# EAGLE board E-Piano-SM (EAGLE 9.4.0)
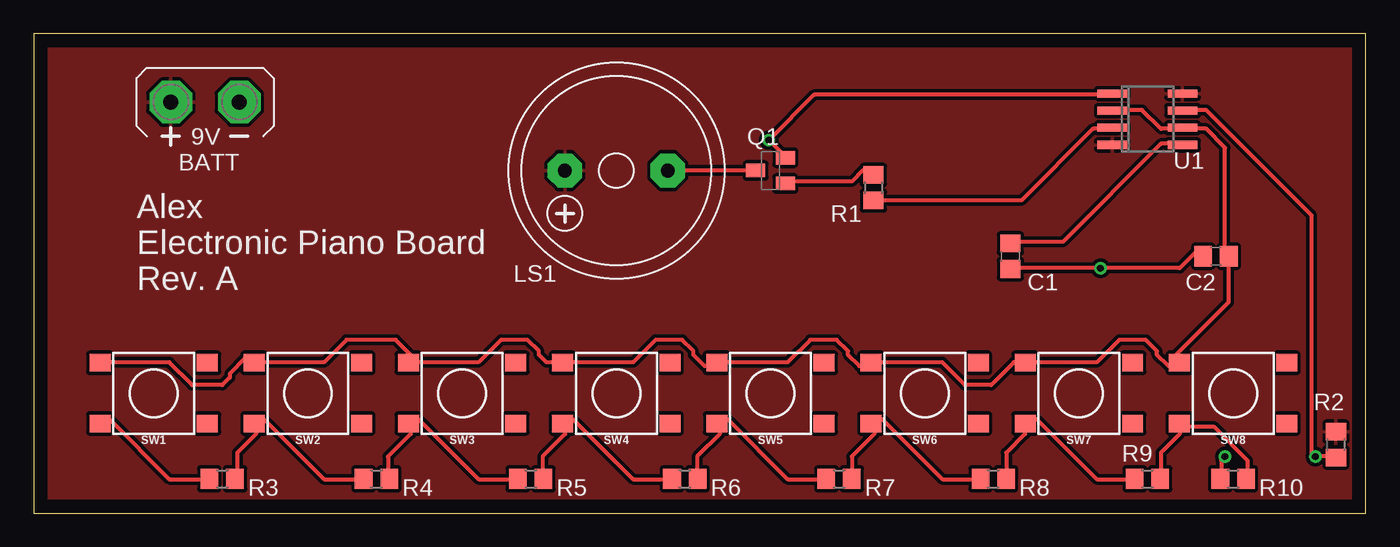
[diagram p0: board, top side]
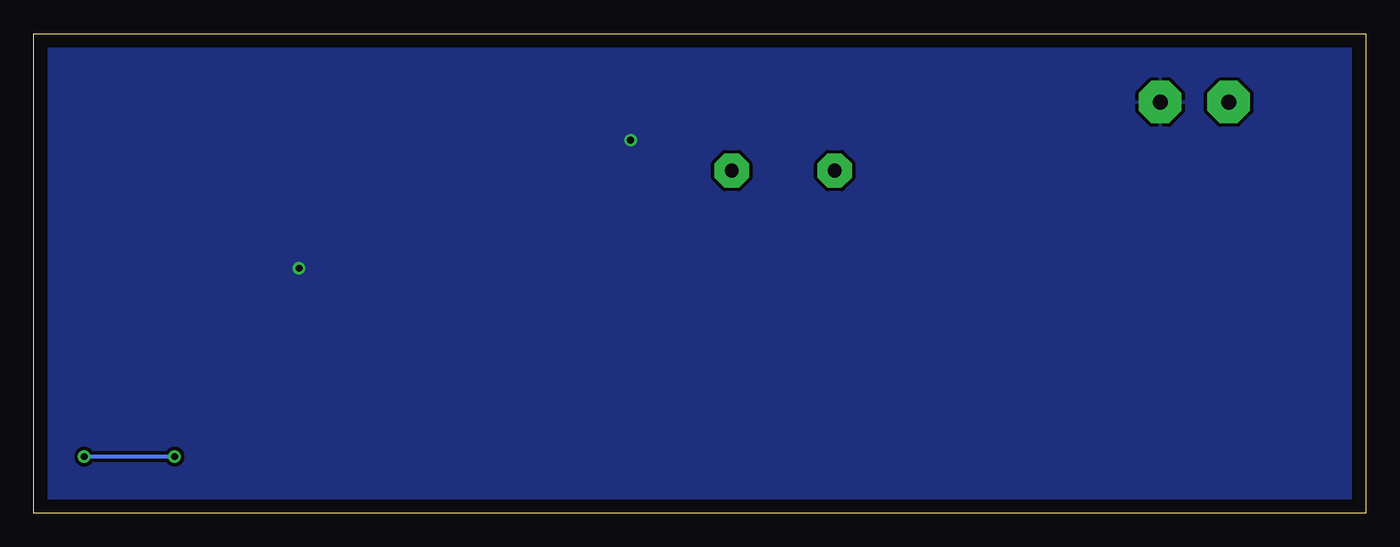
[diagram p1: board, bottom side, seen from below]

Size 98.73 x 35.55 mm. Coordinates in mm from the lower left corner, seen from the top.
Outline: 0,0 98.73,0 98.73,35.55 0,35.55 0,0
Copper layers (1*16): Top 0.035mm / dielectric 1.5mm / Bottom 0.035mm
Design rules "default": minimum track width 6mil, minimum drill 0.35mm, track to track 6mil, track to pad 6mil, pad to pad 6mil, via to via 6mil, smd to smd 6mil, copper to edge 40mil, drill to drill 6mil, minimum pad ring 10mil, minimum via ring 8mil, stop-mask expansion 4mil, vias tented up to drill 0mil, thermal gap 10mil
Net classes: 0 default: width 0.305 mm, drill 0.508 mm, clearance 0.254 mm

## Footprints (pad centres in the part's own frame; a part is rotated, then mirrored left to right if it is on the bottom)
AB9V = drill 1.118 pad 3.15 octagon: + 0,2.54; - 0,-2.54
C0805 = smd 1.3 x 1.5: 1 -0.95,0; 2 0.95,0
F/HMB = drill 1.016 pad 2.54 octagon: + 3.81,0; - -3.81,0
SOT23-BEC = smd 1 x 1.4: B -0.95,-1.1; C 0,1.1; E 0.95,-1.1
R0805 = smd 1.3 x 1.5: 1 -0.95,0; 2 0.95,0
TACTILE_SWITCH_SMD_6.2MM_TALL = smd 1.55 x 1.3: A1 -3.975,-2.25; A2 3.975,-2.25; B1 -3.975,2.25; B2 3.975,2.25
SO08 = smd 0.6 x 2.2: 1 -1.905,-2.6; 2 -0.635,-2.6; 3 0.635,-2.6; 4 1.905,-2.6; 5 1.905,2.6; 6 0.635,2.6; 7 -0.635,2.6; 8 -1.905,2.6

## Placement (x,y rotation side)
BATT  AB9V  [AB9V]  12.7,30.48 90 top
C1  0.1uF  [C0805]  72.39,19.05 270 top
C2  0.1uF  [C0805]  87.63,19.05 180 top
LS1  [F/HMB]  43.18,25.4 180 top
Q1  BCW66  [SOT23-BEC]  54.61,25.4 90 top
R1  3K  [R0805]  62.23,24.13 270 top
R2  1K  [R0805]  96.52,5.08 90 top
R3  1.5K  [R0805]  13.97,2.54 0 top
R4  1.3K  [R0805]  25.4,2.54 0 top
R5  620  [R0805]  36.83,2.54 0 top
R6  1.1K  [R0805]  48.26,2.54 0 top
R7  1K  [R0805]  59.69,2.54 0 top
R8  910  [R0805]  71.12,2.54 0 top
R9  390  [R0805]  82.55,2.54 0 top
R10  6.2K  [R0805]  88.9,2.54 0 top
SW1  MOMENTARY-SWITCH-SPST-SMD-6.2MM-TALL  [TACTILE_SWITCH_SMD_6.2MM_TALL]  8.89,8.89 180 top
SW2  MOMENTARY-SWITCH-SPST-SMD-6.2MM-TALL  [TACTILE_SWITCH_SMD_6.2MM_TALL]  20.32,8.89 180 top
SW3  MOMENTARY-SWITCH-SPST-SMD-6.2MM-TALL  [TACTILE_SWITCH_SMD_6.2MM_TALL]  31.75,8.89 180 top
SW4  MOMENTARY-SWITCH-SPST-SMD-6.2MM-TALL  [TACTILE_SWITCH_SMD_6.2MM_TALL]  43.18,8.89 180 top
SW5  MOMENTARY-SWITCH-SPST-SMD-6.2MM-TALL  [TACTILE_SWITCH_SMD_6.2MM_TALL]  54.61,8.89 180 top
SW6  MOMENTARY-SWITCH-SPST-SMD-6.2MM-TALL  [TACTILE_SWITCH_SMD_6.2MM_TALL]  66.04,8.89 180 top
SW7  MOMENTARY-SWITCH-SPST-SMD-6.2MM-TALL  [TACTILE_SWITCH_SMD_6.2MM_TALL]  77.47,8.89 180 top
SW8  MOMENTARY-SWITCH-SPST-SMD-6.2MM-TALL  [TACTILE_SWITCH_SMD_6.2MM_TALL]  88.9,8.89 180 top
U1  NE555D  [SO08]  82.55,29.21 270 top

## Library data of the parts
BATT = battery; MOUSER#: 534-81-8TB; MPN: 81-8; OC_NEWARK: unknown
C1 C2 = rcl; MOUSER#: 603-CC805JRX7R9BB104; MPN: CC805JRX7R9BB104; OC_NEWARK: unknown; SPICEPREFIX: C
LS1 = buzzer; MOUSER#: 665-AST-01508MR-R; OC_FARNELL: unknown; OC_NEWARK: unknown
Q1 = transistor; MF: FAIRCHILD SEMICONDUCTOR; MOUSER#: 726-BCW66KHE6327HTSA; MPN: PN2222ATF; OC_NEWARK: 58K2048
R1 R2 R7 = rcl; MOUSER#: 652-CR0805FX-1001ELF; OC_NEWARK: unknown; SPICEPREFIX: R
R3 = rcl; MOUSER#: 652-CR0805FX-1501ELF; OC_NEWARK: unknown; SPICEPREFIX: R
R4 = rcl; MOUSER#: 652-CR0805JW-132ELF; OC_NEWARK: unknown; SPICEPREFIX: R
R5 = rcl; MOUSER#: 652-CR0805JW-621ELF; OC_NEWARK: unknown; SPICEPREFIX: R
R6 = rcl; MOUSER#: 652-CR0805FX-1101ELF; OC_NEWARK: unknown; SPICEPREFIX: R
R8 = rcl; MOUSER#: 652-CR0805FX-9100ELF; OC_NEWARK: unknown; SPICEPREFIX: R
R9 = rcl; MOUSER#: 652-CR0805JW-391ELF; OC_NEWARK: unknown; SPICEPREFIX: R
R10 = rcl; MOUSER#: 652-CR0805FX-6201ELF; OC_NEWARK: unknown; SPICEPREFIX: R
SW1-SW8 = SparkFun-Switches; MOUSER#: 693-1301.9317; MPN: 1301.9317; OC_NEWARK: unknown; PROD_ID: SWCH-11966; SF_SKU: COM-12992
U1 = linear; MOUSER#: 595-TLC555CDR; OC_NEWARK: unknown

## Nets
0: BATT.- C1.2 C2.2 Q1.E U1.1
N$1: R9.2 R10.2 SW8.B2
N$2: R2.1 R10.1 U1.7
N$3: R3.1 SW1.B2
N$4: R8.2 R9.1 SW7.B2
N$5: R7.2 R8.1 SW6.B2
N$6: R6.2 R7.1 SW5.B2
N$7: R5.2 R6.1 SW4.B2
N$8: R4.2 R5.1 SW3.B2
N$9: R3.2 R4.1 SW2.B2
N$11: R1.2 U1.3
N$12: C1.1 U1.5
N$13: LS1.- Q1.C
N$14: Q1.B R1.1
TR: C2.1 SW1.A2 SW2.A2 SW3.A2 SW4.A2 SW5.A2 SW6.A2 SW7.A2 SW8.A2 U1.2 U1.6
VCC: BATT.+ LS1.+ R2.2 U1.4 U1.8

## Tracks (layer width: path | path; a pad name or v marks a point on that pad's centre or on a via)
0  (via drill 0.51)
  Top 0.305: C1.2 72.64,18.16 v79.07,18.16 84.94,18.16 86.06,19.28 86.61,19.28 C2.2 | Q1.E 55.82,26.33 v54.48,27.66 57.84,31.01 79.91,31.01 U1.1
  pour Bottom: -1.27,36.83 -1.27,-1.27 100.33,-1.27 100.33,36.83
N$1
  Top 0.305: 84.94,6.43 84.94,5.87 83.54,4.47 83.54,2.79 R9.2 | 84.94,6.43 87.45,6.43 89.97,3.91 89.97,2.79 R10.2 | 84.94,6.43 SW8.B2
N$2  (via drill 0.51)
  Top 0.305: v88.29,4.19 88.01,3.91 88.01,2.79 R10.1 | R2.1 96.39,4.19 v95,4.19 94.72,4.47 94.72,22.07 86.89,29.9 85.22,29.9 U1.7
  Bottom 0.305: v95,4.19 v88.29,4.19
N$3
  Top 0.305: R3.1 12.85,2.52 10.06,2.52 5.59,6.99 5.31,6.99 5.03,6.71 SW1.B2
N$4
  Top 0.305: R8.2 72.08,2.79 72.08,4.47 73.48,5.87 73.48,6.43 SW7.B2 73.76,6.71 74.04,6.99 74.32,6.99 78.79,2.52 81.58,2.52 R9.1
N$5
  Top 0.305: R7.2 60.63,2.79 60.63,4.19 62.31,5.87 62.31,6.43 SW6.B2 62.31,6.71 62.59,6.99 62.87,6.99 67.33,2.52 70.13,2.52 R8.1
N$6
  Top 0.305: R6.2 49.17,2.79 49.17,4.19 50.85,5.87 50.85,6.43 SW5.B2 50.85,6.71 51.13,6.99 51.41,6.99 55.88,2.52 58.67,2.52 R7.1
N$7
  Top 0.305: R5.2 37.72,2.79 37.72,4.19 39.4,5.87 39.4,6.43 SW4.B2 39.4,6.71 39.67,6.99 39.95,6.99 44.42,2.52 47.22,2.52 R6.1
N$8
  Top 0.305: R4.2 26.26,2.79 26.26,4.19 27.94,5.87 27.94,6.43 SW3.B2 27.94,6.71 28.22,6.99 28.5,6.99 32.97,2.52 35.76,2.52 R5.1
N$9
  Top 0.305: R3.2 15.09,2.79 15.09,4.47 16.48,5.87 16.48,6.43 SW2.B2 16.48,6.71 16.76,6.99 17.04,6.99 21.51,2.52 24.31,2.52 R4.1
N$11
  Top 0.305: R1.2 62.31,23.19 73.2,23.19 78.51,28.5 79.91,28.5 U1.3
N$12
  Top 0.305: C1.1 72.64,20.12 76.28,20.12 83.54,27.38 84.94,27.38 U1.5
N$13
  Top 0.305: Q1.C 53.24,25.43 47.22,25.43 LS1.-
N$14
  Top 0.305: Q1.B 55.75,24.59 60.63,24.59 61.47,25.43 61.75,25.43 62.03,25.15 R1.1
TR
  Top 0.305: SW1.A2 5.03,11.18 10.06,11.18 11.73,9.5 13.97,9.5 14.53,10.06 14.53,10.34 15.65,11.46 15.93,11.46 16.2,11.18 SW2.A2 16.48,11.18 21.51,11.18 23.19,12.85 26.82,12.85 28.5,11.18 | 28.5,11.18 32.97,11.18 34.65,12.85 36.6,12.85 37.44,12.01 37.44,11.73 38,11.18 39.12,11.18 SW4.A2 39.4,11.18 44.42,11.18 46.1,12.85 48.06,12.85 48.9,12.01 48.9,11.73 49.73,10.9 50.57,10.9 SW5.A2 50.85,11.18 55.88,11.18 57.56,12.85 59.51,12.85 60.35,12.01 60.35,11.73 61.19,10.9 62.03,10.9 SW6.A2 62.31,11.18 67.33,11.18 69.01,9.5 70.97,9.5 72.64,11.18 73.48,11.18 SW7.A2 73.76,11.18 78.79,11.18 80.47,12.85 82.42,12.85 83.26,12.01 83.26,11.73 84.1,10.9 84.66,10.9 SW8.A2 84.66,11.18 84.66,11.73 88.57,15.65 88.57,19 C2.1 88.57,19.28 88.29,19.56 88.29,27.1 86.89,28.5 85.22,28.5 U1.6 84.94,28.5 83.54,28.5 82.14,29.9 80.19,29.9 U1.2 | 28.5,11.18 27.94,11.18 SW3.A2 28.5,11.18
VCC
  pour Top: -1.27,-2.54 100.33,-2.54 100.33,38.1 -1.27,38.1

## Text on the board
tPlace: Alex / Electronic Piano Board / Rev. A